# EAGLE board CT_schematic (EAGLE 7.6.0)

Size 100 x 80 mm. Coordinates in mm from the lower left corner, seen from the top.
Outline: 0,0 100,0 100,80 0,80 0,0
Copper layers (1*16): Top 0.035mm / dielectric 1.5mm / Bottom 0.035mm
Design rules "default": minimum track width 10mil, minimum drill 24mil, track to track 8mil, track to pad 8mil, pad to pad 8mil, via to via 8mil, smd to smd 8mil, copper to edge 40mil, drill to drill 8mil, minimum pad ring 10mil, minimum via ring 8mil, stop-mask expansion 4mil, vias tented up to drill 0mil, thermal gap 10mil

## Footprints (pad centres in the part's own frame; a part is rotated, then mirrored left to right if it is on the bottom)
C0603 = smd 0.8 x 0.8: 1 -0.762,0; 2 0.762,0
C0402 = smd 0.5 x 0.5: 1 -0.508,0; 2 0.508,0
C1210 = smd 1.2 x 2.5: 1 -1.524,0; 2 1.524,0
C0805 = smd 1.2 x 1.3: 1 -1.016,0; 2 1.016,0
R0603 = smd 0.8 x 0.8: 1 -0.762,0; 2 0.762,0
EXV-9H = smd 3.505 x 1.676: 1 -2.857,0; 2 2.857,0
L0603 = smd 0.8 x 0.8: 1 -0.762,0; 2 0.762,0
IND25X25CZ = smd 2.489 x 3.429: 1 -2.718,0; 2 2.718,0
PJ-037B_PACKAGE = drill 3.7 square: 1 12,0 | drill 3.2 square: 2 6,0
LQFP144 = smd 0.35 x 1.35: 1 -8.75,-10.625; 2 -8.25,-10.625; 3 -7.75,-10.625; 4 -7.25,-10.625; 5 -6.75,-10.625; 6 -6.25,-10.625; 7 -5.75,-10.625; 8 -5.25,-10.625; 9 -4.75,-10.625; 10 -4.25,-10.625; 11 -3.75,-10.625; 12 -3.25,-10.625; 13 -2.75,-10.62; 14 -2.25,-10.625; 15 -1.75,-10.625; 16 -1.25,-10.625; 17 -0.75,-10.625; 18 -0.25,-10.625; 19 0.25,-10.625; 20 0.75,-10.625; 21 1.25,-10.625; 22 1.75,-10.625; 23 2.25,-10.625; 24 2.75,-10.62; 25 3.25,-10.625; 26 3.75,-10.625; 27 4.25,-10.625; 28 4.75,-10.625; 29 5.25,-10.625; 30 5.75,-10.625; 31 6.25,-10.625; 32 6.75,-10.625; 33 7.25,-10.625; 34 7.75,-10.625; 35 8.25,-10.625; 36 8.75,-10.625; 73 8.75,10.625; 74 8.25,10.625; 75 7.75,10.625; 76 7.25,10.625; 77 6.75,10.625; 78 6.25,10.625; 79 5.75,10.625; 80 5.25,10.625; 81 4.75,10.625; 82 4.25,10.625; 83 3.75,10.625; 84 3.25,10.625; 85 2.75,10.625; 86 2.25,10.625; 87 1.75,10.625; 88 1.25,10.625; 89 0.75,10.625; 90 0.25,10.625; 91 -0.25,10.625; 92 -0.75,10.625; 93 -1.25,10.625; 94 -1.75,10.625; 95 -2.25,10.625; 96 -2.75,10.625; 97 -3.25,10.625; 98 -3.75,10.625; 99 -4.25,10.625; 100 -4.75,10.625; 101 -5.25,10.625; 102 -5.75,10.625; 103 -6.25,10.625; 104 -6.75,10.625; 105 -7.25,10.625; 106 -7.75,10.625; 107 -8.25,10.625; 108 -8.75,10.625 | smd 1.35 x 0.35: 37 10.625,-8.75; 38 10.625,-8.25; 39 10.625,-7.75; 40 10.625,-7.25; 41 10.625,-6.75; 42 10.625,-6.25; 43 10.625,-5.75; 44 10.625,-5.25; 45 10.625,-4.75; 46 10.625,-4.25; 47 10.625,-3.75; 48 10.625,-3.25; 49 10.625,-2.75; 50 10.625,-2.25; 51 10.625,-1.75; 52 10.625,-1.25; 53 10.625,-0.75; 54 10.625,-0.25; 55 10.625,0.25; 56 10.625,0.75; 57 10.625,1.25; 58 10.625,1.75; 59 10.625,2.25; 60 10.625,2.75; 61 10.625,3.25; 62 10.625,3.75; 63 10.625,4.25; 64 10.625,4.75; 65 10.625,5.25; 66 10.625,5.75; 67 10.625,6.25; 68 10.625,6.75; 69 10.625,7.25; 70 10.625,7.75; 71 10.625,8.25; 72 10.625,8.75; 109 -10.625,8.75; 110 -10.625,8.25; 111 -10.625,7.75; 112 -10.625,7.25; 113 -10.625,6.75; 114 -10.625,6.25; 115 -10.625,5.75; 116 -10.625,5.25; 117 -10.625,4.75; 118 -10.625,4.25; 119 -10.625,3.75; 120 -10.625,3.25; 121 -10.625,2.75; 122 -10.625,2.25; 123 -10.625,1.75; 124 -10.625,1.25; 125 -10.625,0.75; 126 -10.625,0.25; 127 -10.625,-0.25; 128 -10.625,-0.75; 129 -10.625,-1.25; 130 -10.625,-1.75; 131 -10.625,-2.25; 132 -10.625,-2.75; 133 -10.625,-3.25; 134 -10.625,-3.75; 135 -10.625,-4.25; 136 -10.625,-4.75; 137 -10.625,-5.25; 138 -10.625,-5.75; 139 -10.625,-6.25; 140 -10.625,-6.75; 141 -10.625,-7.25; 142 -10.625,-7.75; 143 -10.625,-8.25; 144 -10.625,-8.75
VFBGA48 = smd 0.35 x 0.35: A1 -1.875,2.625; A2 -1.125,2.625; A3 -0.375,2.625; A4 0.375,2.625; A5 1.125,2.625; A6 1.875,2.625; B1 -1.875,1.875; B2 -1.125,1.875; B3 -0.375,1.875; B4 0.375,1.875; B5 1.125,1.875; B6 1.875,1.875; C1 -1.875,1.125; C2 -1.125,1.125; C3 -0.375,1.125; C4 0.375,1.125; C5 1.125,1.125; C6 1.875,1.125; D1 -1.875,0.375; D2 -1.125,0.375; D3 -0.375,0.375; D4 0.375,0.375; D5 1.125,0.375; D6 1.875,0.375; E1 -1.875,-0.375; E2 -1.125,-0.375; E3 -0.375,-0.375; E4 0.375,-0.375; E5 1.125,-0.375; E6 1.875,-0.375; F1 -1.875,-1.125; F2 -1.125,-1.125; F3 -0.375,-1.125; F4 0.375,-1.125; F5 1.125,-1.125; F6 1.875,-1.125; G1 -1.875,-1.875; G2 -1.125,-1.875; G3 -0.375,-1.875; G4 0.375,-1.875; G5 1.125,-1.875; G6 1.875,-1.875; H1 -1.875,-2.625; H2 -1.125,-2.625; H3 -0.375,-2.625; H4 0.375,-2.625; H5 1.125,-2.625; H6 1.875,-2.625
QFN-32 = smd 0.6 x 0.3: 1 -2.3,1.75; 2 -2.3,1.25; 3 -2.3,0.75; 4 -2.3,0.25; 5 -2.3,-0.25; 6 -2.3,-0.75; 7 -2.3,-1.25; 8 -2.3,-1.75; 17 2.3,-1.75; 18 2.3,-1.25; 19 2.3,-0.75; 20 2.3,-0.25; 21 2.3,0.25; 22 2.3,0.75; 23 2.3,1.25; 24 2.3,1.75 | smd 0.3 x 0.6: 9 -1.75,-2.3; 10 -1.25,-2.3; 11 -0.75,-2.3; 12 -0.25,-2.3; 13 0.25,-2.3; 14 0.75,-2.3; 15 1.25,-2.3; 16 1.75,-2.3; 25 1.75,2.3; 26 1.25,2.3; 27 0.75,2.3; 28 0.25,2.3; 29 -0.25,2.3; 30 -0.75,2.3; 31 -1.25,2.3; 32 -1.75,2.3 | smd 3.2 x 3.2: EXP 0,0
SJ-43515TS-SMT-TR = smd 2.2 x 3: 1 0.6,-7.4; 4 3.4,-7.4 | smd 3 x 3: 2 12.8,-7.4; 5 17,-3 | smd 2 x 3: 3 5.3,0; 6 2.5,0 | drill 1.8: P$7 4.5,-3.69; P$8 11.54,-3.69
WM-64PC = drill 0.6 pad 1: 1 -1,0.95; 2 -1,-0.95
SOIC-8 = smd 1.6 x 0.6: 1 -2.7,1.905 | smd 1.55 x 0.6: 2 -2.7,0.635; 3 -2.7,-0.635; 4 -2.7,-1.905; 5 2.7,-1.905; 6 2.7,-0.635; 7 2.7,0.635; 8 2.7,1.905
USB-A-H = drill 0.914: 1 2.718,3.493; 2 2.718,1.003; 3 2.718,-1.003; 4 2.718,-3.493 | drill 2.311: 5 0,-6.566; 6 0,6.566
SOT143B = smd 1 x 0.7: 1 -0.75,-1 | smd 0.6 x 0.7: 2 0.95,-1; 3 0.95,1; 4 -0.95,1
QFN-28 = smd 0.813 x 0.305: 1 -2.451,1.5; 2 -2.451,1; 3 -2.451,0.5; 4 -2.451,0; 5 -2.451,-0.5; 6 -2.451,-1; 7 -2.451,-1.5; 15 2.451,-1.5; 16 2.451,-1; 17 2.451,-0.5; 18 2.451,0; 19 2.451,0.5; 20 2.451,1; 21 2.451,1.5 | smd 0.305 x 0.813: 8 -1.5,-2.451; 9 -1,-2.451; 10 -0.5,-2.451; 11 0,-2.451; 12 0.5,-2.451; 13 1,-2.451; 14 1.5,-2.451; 22 1.5,2.451; 23 1,2.451; 24 0.5,2.451; 25 0,2.451; 26 -0.5,2.451; 27 -1,2.451; 28 -1.5,2.451 | smd 3.607 x 3.607: 29 0,0
ABS07-32.768KHZ-7-T = smd 1.1 x 2.4: 1 -2.5,0; 2 0,0
ABLS-25.000MHZ-B2F-T = smd 5.6 x 2.8: 1 -3.81,0; 2 5.69,0
ABLS-12.288MHZ-B4-T = smd 5.6 x 2.8: 1 -3.81,0; 2 5.69,0
ASFL1 = smd 1.7 x 1.5: 1 -1.27,-1.1; 2 1.27,-1.1; 3 1.27,1.1; 4 -1.27,1.1
WSON-8 = smd 0.3 x 0.6: 1 -0.75,0; 2 0.05,0; 3 0.85,0; 4 1.65,0; 5 1.65,3.8; 6 0.85,3.8; 7 0.05,3.8; 8 -0.75,3.8 | smd 3 x 2.6: PAD 0.45,1.9
IR3899MTR1PBF = smd 0.25 x 0.75: 1 0,0; 2 0.5,0; 3 1,0; 4 1.5,0; 5 2,0; 6 2.5,0; 7 3,0 | smd 0.75 x 0.25: 8 3.425,0.78; 9 3.425,1.28; 10 3.425,1.78; 14 -0.425,1.78; 15 -0.425,1.28; 16 -0.425,0.78 | smd 0.3 x 1.95: 11 3.22,3.63 | smd 1.62 x 2.42: 12 1.786,3.8 | smd 1 x 1.95: 13 0.117,3.63 | smd 2.19 x 1.25: 17 1.51,1.26
SON-6 = smd 0.55 x 0.3: 1 -0.355,0.5 | smd 0.52 x 0.3: 2 -0.37,0; 3 -0.37,-0.5; 4 0.37,-0.5; 5 0.37,0; 6 0.37,0.5
SW_4-1437565-2 = smd 1.4 x 2.1: 1 -2.23,4.55; 2 -2.23,-4.55; 3 2.23,4.55; 4 2.23,-4.55
LGM67K-G1J2-24-Z = smd 0.8 x 1.4: A -2,0; C 0,0
NC7SZ125M5X = smd 1.3 x 0.7: 1 -1.3,0.95; 2 -1.3,0; 3 -1.3,-0.95; 4 1.3,-0.95; 5 1.3,0.95

## Placement (x,y rotation side)
C1  1e-06  [C0603]  -91.44,87.63 0 top  (outside the outline)
C2  1e-07  [C0603]  -95.25,87.63 0 top  (outside the outline)
C3  1e-07  [C0603]  -15.24,92.71 0 top  (outside the outline)
C4  1e-07  [C0603]  -19.05,92.71 0 top  (outside the outline)
C5  1e-07  [C0603]  -22.86,92.71 0 top  (outside the outline)
C6  1e-07  [C0603]  -26.67,92.71 0 top  (outside the outline)
C7  1e-07  [C0603]  -30.48,92.71 0 top  (outside the outline)
C8  1e-07  [C0603]  -34.29,92.71 0 top  (outside the outline)
C9  1e-07  [C0603]  -38.1,92.71 0 top  (outside the outline)
C10  1e-07  [C0603]  -41.91,92.71 0 top  (outside the outline)
C11  1e-07  [C0603]  -45.72,92.71 0 top  (outside the outline)
C12  1e-07  [C0603]  -49.53,92.71 0 top  (outside the outline)
C13  1e-07  [C0603]  -53.34,92.71 0 top  (outside the outline)
C14  4.7e-06  [C0603]  -80.01,87.63 0 top  (outside the outline)
C15  1e-08  [C0603]  -57.15,92.71 0 top  (outside the outline)
C16  1e-06  [C0603]  -60.96,92.71 0 top  (outside the outline)
C17  1e-11  [C0402]  -77.47,97.79 0 top  (outside the outline)
C18  1e-11  [C0402]  -81.28,97.79 0 top  (outside the outline)
C19  1e-11  [C0402]  -85.09,97.79 0 top  (outside the outline)
C20  1e-11  [C0402]  -88.9,97.79 0 top  (outside the outline)
C21  1e-07  [C0402]  -92.71,97.79 0 top  (outside the outline)
C22  2.2e-06  [C0603]  -83.82,87.63 0 top  (outside the outline)
C23  1e-06  [C0603]  -64.77,92.71 0 top  (outside the outline)
C24  1e-06  [C0603]  -68.58,92.71 0 top  (outside the outline)
C25  1e-06  [C0603]  -72.39,92.71 0 top  (outside the outline)
C26  1e-06  [C0603]  -76.2,92.71 0 top  (outside the outline)
C27  1e-06  [C0603]  -80.01,92.71 0 top  (outside the outline)
C28  1e-06  [C0603]  -83.82,92.71 0 top  (outside the outline)
C29  1e-06  [C0603]  -87.63,92.71 0 top  (outside the outline)
C30  1e-07  [C0402]  -96.52,97.79 0 top  (outside the outline)
C31  1e-07  [C0402]  -15.24,102.87 0 top  (outside the outline)
C32  1e-07  [C0402]  -19.05,102.87 0 top  (outside the outline)
C33  1e-07  [C0402]  -22.86,102.87 0 top  (outside the outline)
C34  1e-06  [C0603]  -91.44,92.71 0 top  (outside the outline)
C35  1e-07  [C0402]  -26.67,102.87 0 top  (outside the outline)
C36  2.2e-05  [C1210]  -66.04,74.93 0 top  (outside the outline)
C37  2.2e-05  [C1210]  -72.39,74.93 0 top  (outside the outline)
C38  1e-09  [C0402]  -30.48,102.87 0 top  (outside the outline)
C39  1e-09  [C0402]  -34.29,102.87 0 top  (outside the outline)
C40  1e-07  [C0402]  -38.1,102.87 0 top  (outside the outline)
C41  1e-07  [C0402]  -41.91,102.87 0 top  (outside the outline)
C42  1e-07  [C0402]  -45.72,102.87 0 top  (outside the outline)
C43  1e-07  [C0402]  -49.53,102.87 0 top  (outside the outline)
C44  1e-07  [C0402]  -53.34,102.87 0 top  (outside the outline)
C45  1e-05  [C0805]  -96.52,74.93 0 top  (outside the outline)
C46  1e-05  [C0805]  -15.24,82.55 0 top  (outside the outline)
C47  1e-05  [C0805]  -20.32,82.55 0 top  (outside the outline)
C48  1e-05  [C0805]  -25.4,82.55 0 top  (outside the outline)
C49  1e-05  [C0805]  -30.48,82.55 0 top  (outside the outline)
C50  2.2e-11  [C0402]  -69.85,97.79 0 top  (outside the outline)
C51  2.2e-11  [C0402]  -73.66,97.79 0 top  (outside the outline)
C52  1e-08  [C0402]  -57.15,102.87 0 top  (outside the outline)
C53  1e-08  [C0402]  -60.96,102.87 0 top  (outside the outline)
C54  1e-05  [C1210]  -78.74,74.93 0 top  (outside the outline)
C55  1e-05  [C0805]  -35.56,82.55 0 top  (outside the outline)
C56  0.0001  [C1210]  -85.09,74.93 0 top  (outside the outline)
C57  2.2e-06  [C0603]  -87.63,87.63 0 top  (outside the outline)
C58  1e-07  [C0402]  -64.77,102.87 0 top  (outside the outline)
C59  1e-07  [C0402]  -68.58,102.87 0 top  (outside the outline)
C60  6.9887470079922e-09  [R0603]  -45.72,82.55 0 top  (outside the outline)
C61  2.3825273890883e-07  [R0603]  -55.88,82.55 0 top  (outside the outline)
C64  1e-07  [C0402]  -72.39,102.87 0 top  (outside the outline)
C65  0.0001  [EXV-9H]  -36.83,66.04 0 top  (outside the outline)
C66  0.0001  [EXV-9H]  -48.26,66.04 0 top  (outside the outline)
C67  1e-08  [C0402]  -76.2,102.87 0 top  (outside the outline)
F1  240.0  [L0603]  -95.25,92.71 0 top  (outside the outline)
I1  6.8e-07  [IND25X25CZ]  -17.78,76.2 0 top  (outside the outline)
J1  PJ-037B  [PJ-037B_PACKAGE]  -55.88,44.45 0 top  (outside the outline)
R2  1000.0  [R0603]  -15.24,97.79 0 top  (outside the outline)
R4  4700.0  [R0603]  -19.05,97.79 0 top  (outside the outline)
R5  2200.0  [R0603]  -22.86,97.79 0 top  (outside the outline)
R6  2200.0  [R0603]  -26.67,97.79 0 top  (outside the outline)
R7  10000.0  [R0603]  -91.44,82.55 0 top  (outside the outline)
R8  10000.0  [R0603]  -96.52,82.55 0 top  (outside the outline)
R9  10000.0  [R0603]  -15.24,87.63 0 top  (outside the outline)
R10  10000.0  [R0603]  -20.32,87.63 0 top  (outside the outline)
R11  1270.0  [R0603]  -30.48,97.79 0 top  (outside the outline)
R12  1270.0  [R0603]  -34.29,97.79 0 top  (outside the outline)
R13  10000.0  [R0603]  -25.4,87.63 0 top  (outside the outline)
R14  10000.0  [R0603]  -30.48,87.63 0 top  (outside the outline)
R15  10000.0  [R0603]  -35.56,87.63 0 top  (outside the outline)
R16  10000.0  [R0603]  -40.64,87.63 0 top  (outside the outline)
R17  47000.0  [R0603]  -45.72,87.63 0 top  (outside the outline)
R18  47000.0  [R0603]  -50.8,87.63 0 top  (outside the outline)
R19  47000.0  [R0603]  -55.88,87.63 0 top  (outside the outline)
R20  680.0  [R0603]  -38.1,97.79 0 top  (outside the outline)
R21  100000.0  [R0603]  -76.2,82.55 0 top  (outside the outline)
R22  200.0  [R0603]  -41.91,97.79 0 top  (outside the outline)
R23  1000.0  [R0603]  -45.72,97.79 0 top  (outside the outline)
R24  0.1  [R0603]  -49.53,97.79 0 top  (outside the outline)
R25  4030.2416170974  [R0603]  -63.5,82.55 0 top  (outside the outline)
R26  719.68600305311  [R0603]  -71.12,82.55 0 top  (outside the outline)
R27  75.0  [R0603]  -53.34,97.79 0 top  (outside the outline)
R28  130.0  [R0603]  -57.15,97.79 0 top  (outside the outline)
R29  39000.0  [R0603]  -60.96,87.63 0 top  (outside the outline)
R30  49900.0  [R0603]  -66.04,87.63 0 top  (outside the outline)
R31  5760.0  [R0603]  -60.96,97.79 0 top  (outside the outline)
R32  10000.0  [R0603]  -71.12,87.63 0 top  (outside the outline)
R33  10000.0  [R0603]  -76.2,87.63 0 top  (outside the outline)
R34  9100.0  [R0603]  -64.77,97.79 0 top  (outside the outline)
R35  680000.0  [R0603]  -81.28,82.55 0 top  (outside the outline)
R36  120000.0  [R0603]  -86.36,82.55 0 top  (outside the outline)
U1  STM32F302ZDT7  [LQFP144]  -24.13,11.43 0 top  (outside the outline)
U2  CY62147GE30-45BVXI  [VFBGA48]  -73.66,44.45 0 top  (outside the outline)
U3  SGTL5000XNAA3  [QFN-32]  -48.26,57.15 0 top  (outside the outline)
U4  SJ-43515TS-SMT-TR  [SJ-43515TS-SMT-TR]  -78.74,10.16 0 top  (outside the outline)
U5  SJ-43515TS-SMT-TR  [SJ-43515TS-SMT-TR]  -39.37,33.02 0 top  (outside the outline)
U6  SJ-43515TS-SMT-TR  [SJ-43515TS-SMT-TR]  -67.31,33.02 0 top  (outside the outline)
U7  WM-64PCT  [WM-64PC]  -34.29,57.15 0 top  (outside the outline)
U8  TMP75BID  [SOIC-8]  -58.42,57.15 0 top  (outside the outline)
U9  61400416021  [USB-A-H]  -41.91,8.89 0 top  (outside the outline)
U10  prtr5v0u2ax  [SOT143B]  -88.9,102.87 0 top  (outside the outline)
U11  WM8731CLSEFL  [QFN-28]  -58.42,74.93 0 top  (outside the outline)
U12  SJ-43515TS-SMT-TR  [SJ-43515TS-SMT-TR]  -95.25,33.02 0 top  (outside the outline)
U13  SJ-43515TS-SMT-TR  [SJ-43515TS-SMT-TR]  -39.37,46.99 0 top  (outside the outline)
U14  ABS07-32.768KHZ-7-T  [ABS07-32.768KHZ-7-T]  -36.83,76.2 0 top  (outside the outline)
U15  ABLS-25.000MHZ-B2F-T  [ABLS-25.000MHZ-B2F-T]  -67.31,67.31 0 top  (outside the outline)
U16  ABLS-12.288MHZ-B4-T  [ABLS-12.288MHZ-B4-T]  -87.63,67.31 0 top  (outside the outline)
U17  ASFL-24.57MHZ-NCS  [ASFL1]  -27.94,67.31 0 top  (outside the outline)
U18  LP3878SDX-ADJ/NOPB  [WSON-8]  -80.01,54.61 0 top  (outside the outline)
U19  IR3899MTR1PBF  [IR3899MTR1PBF]  -25.4,54.61 0 top  (outside the outline)
U20  TPS3895ADRYR  [SON-6]  -92.71,101.6 0 top  (outside the outline)
U21  4-1437565-2  [SW_4-1437565-2]  -91.44,44.45 0 top  (outside the outline)
U22  Q65110A2395  [LGM67K-G1J2-24-Z]  -45.72,74.93 0 top  (outside the outline)
U23  nc7sz125m5x  [NC7SZ125M5X]  -90.17,73.66 0 top  (outside the outline)

## Library data of the parts
C1-C61 C64-C67 F1 I1 J1 R2 R4-R36 U1-U23 = circuit_tree

## Nets
CLK_CRYSTAL_U1_8: C17.1 U1.8 U14.1
CLK_CRYSTAL_U1_9: C18.1 U1.9 U14.2
CLK_CRYSTAL_U1_23: C19.1 U1.23 U15.1
CLK_CRYSTAL_U1_24: C20.1 U1.24 U15.2
CLK_CRYSTAL_U11_1: C50.1 U11.1 U16.1
CLK_CRYSTAL_U11_2: C51.1 U11.2 U16.2
CLK_U3_21: U3.21 U17.3
GND: C1.2 C2.2 C3.2 C4.2 C5.2 C6.2 C7.2 C8.2 C9.2 C10.2 C11.2 C12.2 C13.2 C14.2 C15.2 C16.2 C17.2 C18.2 C19.2 C20.2 C21.2 C22.2 C30.2 C31.2 C32.2 C33.2 C34.2 C35.2 C39.2 C40.2 C41.2 C42.2 C43.2 C44.2 C45.2 C46.2 C47.2 C48.2 C49.2 C50.2 C51.2 C52.2 C53.2 C54.2 C55.2 C57.2 C58.2 C59.2 C64.2 C65.2 C66.2 C67.2 J1.2 R2.2 R7.2 R12.2 R16.2 R17.2 R18.2 R19.2 R23.2 R24.1 R24.2 R26.2 R29.2 R31.2 R34.2 R36.2 U1.16 U1.30 U1.31 U1.38 U1.51 U1.61 U1.71 U1.83 U1.94 U1.107 U1.120 U1.130 U1.143 U2.D1 U2.E6 U3.1 U3.3 U3.7 U3.EXP U5.1 U6.1 U7.2 U8.4 U9.4 U9.5 U9.6 U10.1 U11.4 U11.15 U11.19 U11.25 U11.26 U11.29 U12.1 U13.1 U17.2 U18.3 U18.PAD U19.4 U19.11 U19.17 U20.2 U22.C U23.1 U23.3
NET_U1_25: R4.1 U1.25 U23.4
NET_U1_33: C15.1 C16.1 F1.1 U1.32 U1.33
NET_U1_109: R6.1 U1.109 U8.1
NET_U1_110: R5.1 U1.110 U8.2
NET_U1_138: R7.1 U1.138
NET_U1_140: U22.A
NET_U1_142: U21.3 U21.4
NET_U3_10: C33.1 U3.10
NET_U3_29: R11.1 U3.29
NET_U3_31: R12.1 U3.31
NET_U4_1: U3.4 U4.1
NET_U4_2: U3.2 U4.2
NET_U4_5: U3.6 U4.5
NET_U5_2: C24.1 U5.2
NET_U5_5: C23.1 U5.5
NET_U5_11: C24.2
NET_U5_12: C23.2
NET_U6_2: C26.1 C27.1 U6.2
NET_U6_5: C25.1 U6.5
NET_U6_13: C26.2 C27.2
NET_U6_14: C25.2
NET_U7_1: C28.1 C29.1 C34.1 U3.16 U7.1
NET_U7_15: C28.2 C29.2
NET_U8_3: R13.1 U8.3
NET_U8_5: R16.1 U8.5
NET_U8_6: R15.1 U8.6
NET_U8_7: R14.1 U8.7
NET_U10_4: U9.1 U10.4
NET_U11_9: U11.9
NET_U11_20: C44.1 C49.1 U11.20
NET_U12_2: C37.1 R18.1 U12.2
NET_U12_5: C36.1 R17.1 U12.5
NET_U12_13: C36.2
NET_U12_14: C37.2
NET_U13_5: C38.1 C39.1 R19.1 R20.1 U13.5
NET_U13_21: R20.2
NET_U13_22: C38.2
NET_U18_1: C53.1 U18.1
NET_U18_6: R22.2 R23.1 U18.6
NET_U18_8: R21.1 U18.8
NET_U19_1: C60.1 R25.1 R26.1 R27.1 R28.1 U19.1 U19.8
NET_U19_2: C59.1 U19.2
NET_U19_3: C60.2 C61.1 C61.2 U19.3
NET_U19_5: R29.1 U19.5
NET_U19_10: C57.1 U19.10
NET_U19_12: C56.1 I1.1 U19.12
NET_U19_13: U19.13
NET_U19_14: C56.2 U19.14
NET_U19_15: R30.1 R31.1 U19.15
NET_U19_ATNET_3: I1.2 R25.2
NET_U19_ATNET_4: C61.2 R27.2
NET_U19_ATNET_5: R28.2
NET_U20_1: R33.1 R34.1 U20.1
NET_U20_3: R35.2 R36.1 U20.3
NET_U20_4: R32.1 U20.4 U23.2
NET_U21_1: R2.1 U21.1 U21.2
PROC_FMC_A0: U1.10 U2.A3
PROC_FMC_A1: U1.11 U2.A4
PROC_FMC_A2: U1.12 U2.A5
PROC_FMC_A3: U1.13 U2.B3
PROC_FMC_A4: U1.14 U2.B4
PROC_FMC_A5: U1.15 U2.C3
PROC_FMC_A6: U1.50 U2.C4
PROC_FMC_A7: U1.53 U2.D4
PROC_FMC_A8: U1.54 U2.H2
PROC_FMC_A9: U1.55 U2.H3
PROC_FMC_A10: U1.56 U2.H4
PROC_FMC_A11: U1.57 U2.H5
PROC_FMC_A12: U1.87 U2.G3
PROC_FMC_A13: U1.88 U2.G4
PROC_FMC_A14: U1.89 U2.F3
PROC_FMC_A15: U1.90 U2.F4
PROC_FMC_A16: U1.80 U2.E4
PROC_FMC_A17: U1.81 U2.D3
PROC_FMC_D0: U1.85 U2.B6
PROC_FMC_D1: U1.86 U2.C5
PROC_FMC_D2: U1.114 U2.C6
PROC_FMC_D3: U1.115 U2.D5
PROC_FMC_D4: U1.58 U2.E5
PROC_FMC_D5: U1.59 U2.F5
PROC_FMC_D6: U1.60 U2.F6
PROC_FMC_D7: U1.63 U2.G6
PROC_FMC_D8: U1.64 U2.B1
PROC_FMC_D9: U1.65 U2.C1
PROC_FMC_D10: U1.66 U2.C2
PROC_FMC_D11: U1.67 U2.D2
PROC_FMC_D12: U1.68 U2.E2
PROC_FMC_D13: U1.77 U2.F2
PROC_FMC_D14: U1.78 U2.F1
PROC_FMC_D15: U1.79 U2.G1
PROC_FMC_NBL0: U1.141 U2.A1
PROC_FMC_NE2: R9.1 U1.124 U2.B5
PROC_FMC_NOE: R8.1 U1.118 U2.A2
PROC_FMC_NWE: R10.1 U1.119 U2.G5
PROC_I2S2_CK: U1.74 U11.7
PROC_I2S2_EXT_SD: U1.75 U11.10
PROC_I2S2_SD: U1.76 U11.8
PROC_I2S2_WS: U1.73 U11.9 U11.11
PROC_I2S3_CK: U1.111 U3.24
PROC_I2S3_EXT_SD: U1.112 U3.25
PROC_I2S3_SD: U1.113 U3.26
PROC_I2S3_WS: U1.40 U3.23
PROC_USB_DM: U9.2 U10.3
PROC_USB_DP: U9.3 U10.2
VCC_S1_15V3: C54.1 C58.1 C65.1 C66.1 J1.1 R21.2 R30.2 U18.4 U19.9
VCC_TIER1_1V2: C30.1 C55.1 R22.1 U3.30 U18.5
VCC_TIER1_3V3: C1.1 C2.1 C3.1 C4.1 C5.1 C6.1 C7.1 C8.1 C9.1 C10.1 C11.1 C12.1 C13.1 C14.1 C21.1 C22.1 C31.1 C32.1 C35.1 C40.1 C41.1 C42.1 C43.1 C45.1 C46.1 C47.1 C48.1 C52.1 C64.1 C67.1 F1.2 I1.2 R4.2 R5.2 R6.2 R8.2 R9.2 R10.2 R11.2 R13.2 R14.2 R15.2 R25.2 R32.2 R33.2 R35.1 U1.6 U1.17 U1.39 U1.52 U1.62 U1.72 U1.84 U1.95 U1.108 U1.121 U1.131 U1.144 U2.D6 U2.E1 U3.5 U3.20 U8.8 U11.3 U11.5 U11.12 U11.18 U17.4 U20.6 U23.5

## Tracks (layer width: path | path; a pad name or v marks a point on that pad's centre or on a via)
CLK_CRYSTAL_U1_8  (2 unrouted)
CLK_CRYSTAL_U1_9  (2 unrouted)
CLK_CRYSTAL_U1_23  (2 unrouted)
CLK_CRYSTAL_U1_24  (2 unrouted)
CLK_CRYSTAL_U11_1  (2 unrouted)
CLK_CRYSTAL_U11_2  (2 unrouted)
CLK_U3_21  (1 unrouted)
GND  (112 unrouted)
NET_U1_25  (2 unrouted)
NET_U1_33  (4 unrouted)
NET_U1_109  (2 unrouted)
NET_U1_110  (2 unrouted)
NET_U1_138  (1 unrouted)
NET_U1_142  (1 unrouted)
NET_U3_10  (1 unrouted)
NET_U3_29  (1 unrouted)
NET_U3_31  (1 unrouted)
NET_U4_1  (1 unrouted)
NET_U4_2  (1 unrouted)
NET_U4_5  (1 unrouted)
NET_U5_2  (1 unrouted)
NET_U5_5  (1 unrouted)
NET_U6_2  (2 unrouted)
NET_U6_5  (1 unrouted)
NET_U6_13  (1 unrouted)
NET_U7_1  (4 unrouted)
NET_U7_15  (1 unrouted)
NET_U8_3  (1 unrouted)
NET_U8_5  (1 unrouted)
NET_U8_6  (1 unrouted)
NET_U8_7  (1 unrouted)
NET_U10_4  (1 unrouted)
NET_U11_20  (2 unrouted)
NET_U12_2  (2 unrouted)
NET_U12_5  (2 unrouted)
NET_U13_5  (4 unrouted)
NET_U18_1  (1 unrouted)
NET_U18_6  (2 unrouted)
NET_U18_8  (1 unrouted)
NET_U19_1  (6 unrouted)
NET_U19_2  (1 unrouted)
NET_U19_3  (3 unrouted)
NET_U19_5  (1 unrouted)
NET_U19_10  (1 unrouted)
NET_U19_12  (2 unrouted)
NET_U19_14  (1 unrouted)
NET_U19_15  (2 unrouted)
NET_U19_ATNET_3  (1 unrouted)
NET_U19_ATNET_4  (1 unrouted)
NET_U20_1  (2 unrouted)
NET_U20_3  (2 unrouted)
NET_U20_4  (2 unrouted)
NET_U21_1  (2 unrouted)
PROC_FMC_A0  (1 unrouted)
PROC_FMC_A1  (1 unrouted)
PROC_FMC_A2  (1 unrouted)
PROC_FMC_A3  (1 unrouted)
PROC_FMC_A4  (1 unrouted)
PROC_FMC_A5  (1 unrouted)
PROC_FMC_A6  (1 unrouted)
PROC_FMC_A7  (1 unrouted)
PROC_FMC_A8  (1 unrouted)
PROC_FMC_A9  (1 unrouted)
PROC_FMC_A10  (1 unrouted)
PROC_FMC_A11  (1 unrouted)
PROC_FMC_A12  (1 unrouted)
PROC_FMC_A13  (1 unrouted)
PROC_FMC_A14  (1 unrouted)
PROC_FMC_A15  (1 unrouted)
PROC_FMC_A16  (1 unrouted)
PROC_FMC_A17  (1 unrouted)
PROC_FMC_D0  (1 unrouted)
PROC_FMC_D1  (1 unrouted)
PROC_FMC_D2  (1 unrouted)
PROC_FMC_D3  (1 unrouted)
PROC_FMC_D4  (1 unrouted)
PROC_FMC_D5  (1 unrouted)
PROC_FMC_D6  (1 unrouted)
PROC_FMC_D7  (1 unrouted)
PROC_FMC_D8  (1 unrouted)
PROC_FMC_D9  (1 unrouted)
PROC_FMC_D10  (1 unrouted)
PROC_FMC_D11  (1 unrouted)
PROC_FMC_D12  (1 unrouted)
PROC_FMC_D13  (1 unrouted)
PROC_FMC_D14  (1 unrouted)
PROC_FMC_D15  (1 unrouted)
PROC_FMC_NBL0  (1 unrouted)
PROC_FMC_NE2  (2 unrouted)
PROC_FMC_NOE  (2 unrouted)
PROC_FMC_NWE  (2 unrouted)
PROC_I2S2_CK  (1 unrouted)
PROC_I2S2_EXT_SD  (1 unrouted)
PROC_I2S2_SD  (1 unrouted)
PROC_I2S2_WS  (2 unrouted)
PROC_I2S3_CK  (1 unrouted)
PROC_I2S3_EXT_SD  (1 unrouted)
PROC_I2S3_SD  (1 unrouted)
PROC_I2S3_WS  (1 unrouted)
PROC_USB_DM  (1 unrouted)
PROC_USB_DP  (1 unrouted)
VCC_S1_15V3  (8 unrouted)
VCC_TIER1_1V2  (4 unrouted)
VCC_TIER1_3V3  (69 unrouted)